# EAGLE board breakout (EAGLE 7.2.0)
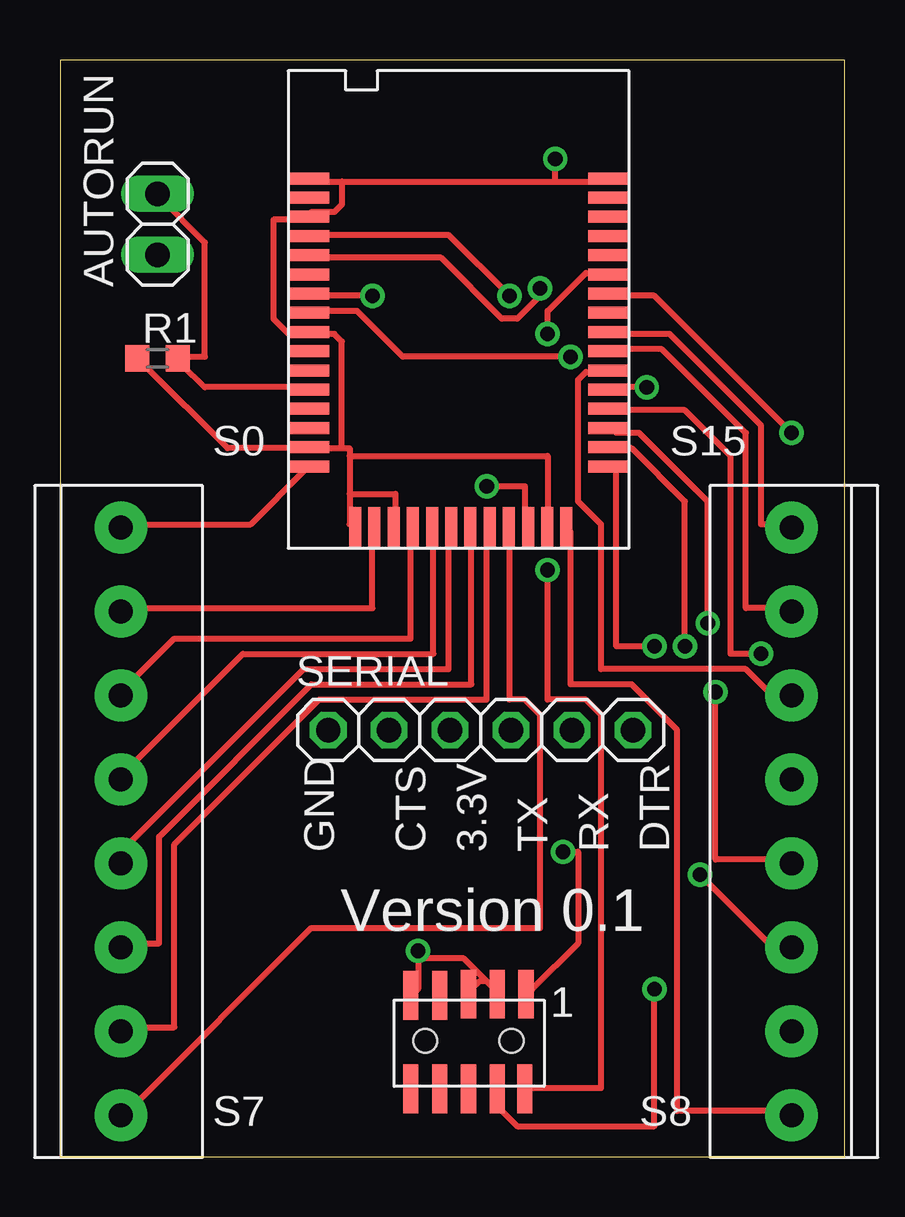
[diagram p0: board, top side]
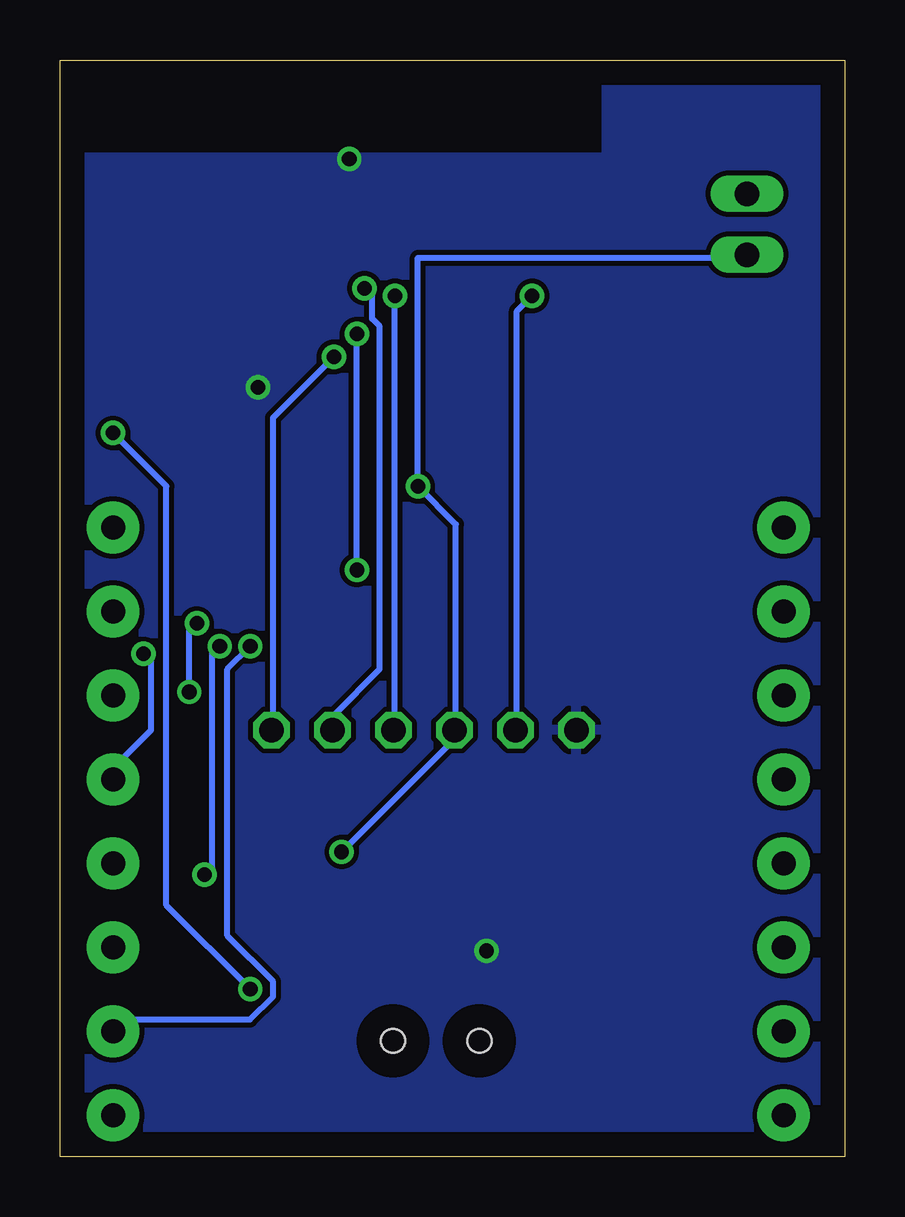
[diagram p1: board, bottom side, seen from below]

Size 32.69 x 45.71 mm. Coordinates in mm from the lower left corner, seen from the top.
Outline: 0,0 32.69,0 32.69,45.71 0,45.71 0,0
Copper layers (1*16): Top 0.035mm / dielectric 1.5mm / Bottom 0.035mm
Design rules "default": minimum track width 10mil, minimum drill 24mil, track to track 8mil, track to pad 8mil, pad to pad 8mil, via to via 8mil, smd to smd 8mil, copper to edge 40mil, drill to drill 8mil, minimum pad ring 10mil, minimum via ring 8mil, stop-mask expansion 4mil, vias tented up to drill 0mil, thermal gap 10mil
tKeepout: area 9.7,41.4 to 34,46.7
bKeepout: area 9.4,41.4 to 34,46.7

## Footprints (pad centres in the part's own frame; a part is rotated, then mirrored left to right if it is on the bottom)
1X02 = drill 1.016 long: 1 -1.27,0; 2 1.27,0
LAIRD-BL600 = smd 0.5 x 1.7: 1 -4.21,-9.34; 2 -3.41,-9.34; 3 -2.61,-9.34; 4 -1.81,-9.34; 5 -1.01,-9.34; 6 -0.21,-9.34; 7 0.59,-9.34; 8 1.39,-9.34; 9 2.19,-9.34; 10 2.99,-9.34; 11 3.79,-9.34; 12 4.59,-9.34 | smd 1.7 x 0.5: 13 6.36,-6.79; 14 6.36,-5.99; 15 6.36,-5.19; 16 6.36,-4.39; 17 6.36,-3.59; 18 6.36,-2.79; 19 6.36,-1.99; 20 6.36,-1.19; 21 6.36,-0.39; 22 6.36,0.41; 23 6.36,1.21; 24 6.36,2.01; 25 6.36,2.81; 26 6.36,3.61; 27 6.36,4.41; 28 6.36,5.21; 29 -6.14,5.21; 30 -6.14,4.41; 31 -6.14,3.61; 32 -6.14,2.81; 33 -6.14,2.01; 34 -6.14,1.21; 35 -6.14,0.41; 36 -6.14,-0.39; 37 -6.14,-1.19; 38 -6.14,-1.99; 39 -6.14,-2.79; 40 -6.14,-3.59; 41 -6.14,-4.39; 42 -6.14,-5.19; 43 -6.14,-5.99; 44 -6.14,-6.79
1X08-3.5MM = drill 1 pad 2.184: 1 -12.25,0; 2 -8.75,0; 3 -5.25,0; 4 -1.75,0; 5 1.75,0; 6 5.25,0; 7 8.75,0; 8 12.25,0
R0603 = smd 1 x 1.1: 1 -0.85,0; 2 0.85,0
1X06 = drill 1.016 octagon: 1 -6.35,0; 2 -3.81,0; 3 -1.27,0; 4 1.27,0; 5 3.81,0; 6 6.35,0
PIN-HEADER-SMT(1.27MM)2X5 = smd 0.635 x 2.032: 1 -2.4,-1.95; 2 -2.35,2; 3 -1.2,-1.95; 4 -1.2,2; 5 0,-1.95; 6 0,2; 7 1.2,-1.9; 8 1.2,2; 9 2.4,-1.9; 10 2.4,2 | hole 1: 1.8,0; -1.8,0

## Placement (x,y rotation side)
AUTORUN  [1X02]  4.06,38.86 90 top
BL1  LAIRD-BL600  [LAIRD-BL600]  16.51,35.56 0 top
JP3  [1X08-3.5MM]  2.54,13.97 270 top
JP4  [1X08-3.5MM]  30.48,13.97 90 top
R1  10K  [R0603]  4.06,33.27 0 top
SERIAL  [1X06]  17.53,17.78 0 top
U$1  PIN-HEADER-SMT(1.27MM)2X5  [PIN-HEADER-SMT(1.27MM)2X5]  17.02,4.83 180 top

## Library data of the parts
AUTORUN = pinhead
BL1 = gclueBT
JP3 JP4 SERIAL = adafruit
R1 = eagle-ltspice; SPICEMODEL: NONE; SPICEPREFIX: R
U$1 = gclue

## Nets
AUTORUN: AUTORUN.2 BL1.40 R1.2
CTS: BL1.35 SERIAL.2
DTR: BL1.36 SERIAL.6
GND: BL1.1 BL1.3 BL1.11 BL1.17 BL1.28 BL1.29 BL1.31 BL1.37 BL1.43 R1.1 SERIAL.1 U$1.3 U$1.5 U$1.9
N$9: BL1.24
N$10: BL1.25
N$11: BL1.26
N$12: BL1.27
NRESET/SWDIO: BL1.22 U$1.4
RTS: BL1.34
RX: BL1.33 SERIAL.5
SIO_0: BL1.44 JP3.1
SIO_1: BL1.2 JP3.2
SIO_2: BL1.4 JP3.3
SIO_3: BL1.5 JP3.4
SIO_4: BL1.6 JP3.5
SIO_5: BL1.7 JP3.6
SIO_6: BL1.8 JP3.7
SIO_7: BL1.9 JP3.8
SIO_8: BL1.12 JP4.1
SIO_9: BL1.13 JP4.2
SIO_10: BL1.14 JP4.3
SIO_11: BL1.15 JP4.4
SIO_12: BL1.16 JP4.5
SIO_13: BL1.18 JP4.6
SIO_14: BL1.19 JP4.7
SIO_15: BL1.20 JP4.8
SIO_16: BL1.21
SWDCLK: BL1.23 U$1.2
TX: BL1.32 SERIAL.4
VCC: AUTORUN.1 BL1.10 SERIAL.3 U$1.1

## Tracks (layer width: path | path; a pad name or v marks a point on that pad's centre or on a via)
AUTORUN
  Top 0.254: BL1.40 10.16,32.07 6.03,32.07 5.08,33.02 R1.2 5.08,33.34 6.03,33.34 6.03,38.1 4.13,40.01 AUTORUN.2
CTS  (via drill 0.61)
  Top 0.254: v13.02,35.88 10.48,35.88 BL1.35
  Bottom 0.254: v13.02,35.88 13.65,35.24 13.65,17.78 SERIAL.2
DTR  (via drill 0.61)
  Top 0.254: v21.27,33.34 14.29,33.34 12.38,35.24 10.48,35.24 BL1.36
  Bottom 0.254: v21.27,33.34 23.81,30.8 23.81,17.78 SERIAL.6
GND  (via drill 0.61)
  Top 0.254: R1.1 3.49,33.02 6.99,29.53 10.16,29.53 BL1.43 10.48,29.53 11.75,29.53 | 12.06,29.21 12.06,29.53 11.75,29.53 | 12.06,29.21 12.06,27.62 | 12.06,27.62 12.06,26.35 BL1.1 | 12.06,27.62 13.97,27.62 13.97,26.35 BL1.3 | 12.06,29.21 20.32,29.21 20.32,26.35 BL1.11 | 11.75,29.53 11.75,33.97 11.43,34.29 10.48,34.29 BL1.37 10.16,34.29 9.53,34.29 8.89,34.92 8.89,39.05 10.16,39.05 BL1.31 10.48,39.37 11.43,39.37 11.75,39.69 11.75,40.64 | 14.92,8.26 14.92,6.99 U$1.9 | 14.92,8.26 16.83,8.26 17.78,7.3 | 17.78,7.3 18.1,6.99 U$1.3 | 17.78,7.3 17.46,7.3 17.14,6.99 U$1.5 | v24.45,32.07 23.18,32.07 BL1.17 | 11.75,40.64 10.48,40.64 BL1.29 | 11.75,40.64 20.64,40.64 | 20.64,40.64 22.86,40.64 BL1.28 | 20.64,40.64 v20.64,41.59 | v14.92,8.57 14.92,8.26
  pour Bottom: -1.27,-1.27 34.29,-1.27 34.8,41.66 9.91,41.66 9.91,46.99 -1.27,46.99
NRESET/SWDIO  (via drill 0.61)
  Top 0.254: v30.48,30.16 24.77,35.88 23.18,35.88 BL1.22 | v24.77,6.99 24.77,1.27 19.05,1.27 18.41,1.91 18.41,2.54 U$1.4
  Bottom 0.254: v30.48,30.16 28.26,27.94 28.26,10.48 v24.77,6.99
RX  (via drill 0.61)
  Top 0.254: v20,36.2 20,35.88 19.05,34.92 18.41,34.92 15.88,37.47 10.48,37.47 BL1.33
  Bottom 0.254: v20,36.2 19.68,35.88 19.68,34.92 19.37,34.61 19.37,20.32 21.27,18.41 21.27,17.78 SERIAL.5
SIO_0
  Top 0.254: BL1.44 10.16,28.57 7.94,26.35 2.54,26.35 JP3.1
SIO_1
  Top 0.254: BL1.2 13.02,26.04 13.02,22.86 2.54,22.86 JP3.2
SIO_2
  Top 0.254: BL1.4 14.61,26.04 14.61,21.59 4.76,21.59 2.54,19.37 JP3.3
SIO_3
  Top 0.254: BL1.5 15.56,26.04 15.56,20.95 7.62,20.95 2.54,15.88 JP3.4
SIO_4
  Top 0.254: JP3.5 2.54,12.7 10.16,20.32 16.19,20.32 16.19,26.04 BL1.6
SIO_5
  Top 0.254: BL1.7 17.14,26.04 17.14,19.68 10.48,19.68 4.13,13.34 4.13,8.89 2.54,8.89 JP3.6
SIO_6
  Top 0.254: BL1.8 17.78,26.04 17.78,19.05 10.79,19.05 4.76,13.02 4.76,5.4 2.54,5.4 JP3.7
SIO_7
  Top 0.254: BL1.9 18.73,26.04 18.73,19.05 19.37,19.05 20,18.41 20,9.53 10.48,9.53 2.86,1.91 2.54,1.91 JP3.8
SIO_8
  Top 0.254: BL1.12 21.27,26.04 21.27,19.68 23.81,19.68 25.72,17.78 25.72,1.91 30.48,1.91 JP4.1
SIO_9  (via drill 0.61)
  Top 0.254: v24.77,21.27 23.18,21.27 23.18,28.57 BL1.13
  Bottom 0.254: v24.77,21.27 25.72,20.32 25.72,9.21 23.81,7.3 23.81,6.67 24.77,5.71 30.48,5.71 JP4.2
SIO_10  (via drill 0.61)
  Top 0.254: v26.04,21.27 26.04,27.3 23.81,29.53 23.18,29.53 BL1.14 | v26.67,11.75 29.53,8.89 30.48,8.89 JP4.3
  Bottom 0.254: v26.04,21.27 26.35,20.95 26.35,12.06 v26.67,11.75
SIO_11  (via drill 0.61)
  Top 0.254: v26.99,22.23 26.99,27.3 24.13,30.16 23.18,30.16 BL1.15 | v27.3,19.37 27.3,12.38 30.48,12.38 JP4.4
  Bottom 0.254: v26.99,22.23 27.3,21.91 v27.3,19.37
SIO_12  (via drill 0.61)
  Top 0.254: v29.21,20.95 27.94,20.95 27.94,29.21 26.04,31.11 23.18,31.11 BL1.16
  Bottom 0.254: v29.21,20.95 28.89,20.64 28.89,17.78 30.48,16.19 JP4.5
SIO_13
  Top 0.254: BL1.18 22.86,32.7 21.91,32.7 21.59,32.38 21.59,27.3 22.54,26.35 22.54,20.32 28.57,20.32 29.53,19.37 30.48,19.37 JP4.6
SIO_14
  Top 0.254: BL1.19 23.18,33.66 25.08,33.66 28.57,30.16 28.57,22.86 30.48,22.86 JP4.7
SIO_15
  Top 0.254: BL1.20 23.18,34.29 25.4,34.29 29.21,30.48 29.21,26.35 30.48,26.35 JP4.8
SWDCLK  (via drill 0.61)
  Top 0.254: v20.32,34.29 20.32,35.24 21.91,36.83 22.86,36.83 BL1.23 | v20.32,24.45 20.32,19.05 21.91,19.05 22.54,18.41 22.54,2.86 19.68,2.86 U$1.2
  Bottom 0.254: v20.32,24.45 v20.32,34.29
TX  (via drill 0.61)
  Top 0.254: v18.73,35.88 16.19,38.42 10.48,38.42 BL1.32
  Bottom 0.254: v18.73,35.88 18.73,17.78 SERIAL.4
VCC  (via drill 0.61)
  Top 0.254: v17.78,27.94 19.37,27.94 19.37,26.35 BL1.10 | v20.95,12.7 21.59,12.7 21.59,8.89 19.68,6.99 U$1.1
  Bottom 0.254: v20.95,12.7 16.51,17.14 16.51,17.78 SERIAL.3 16.19,17.78 16.19,26.35 v17.78,27.94 17.78,37.47 4.13,37.47 AUTORUN.1

## Text on the board
tPlace: S0 | S15 | GND | CTS | 3.3V | TX | RX | DTR | Version 0.1 | S7 | S8